# EAGLE board T04_Display (EAGLE 7.1.0)
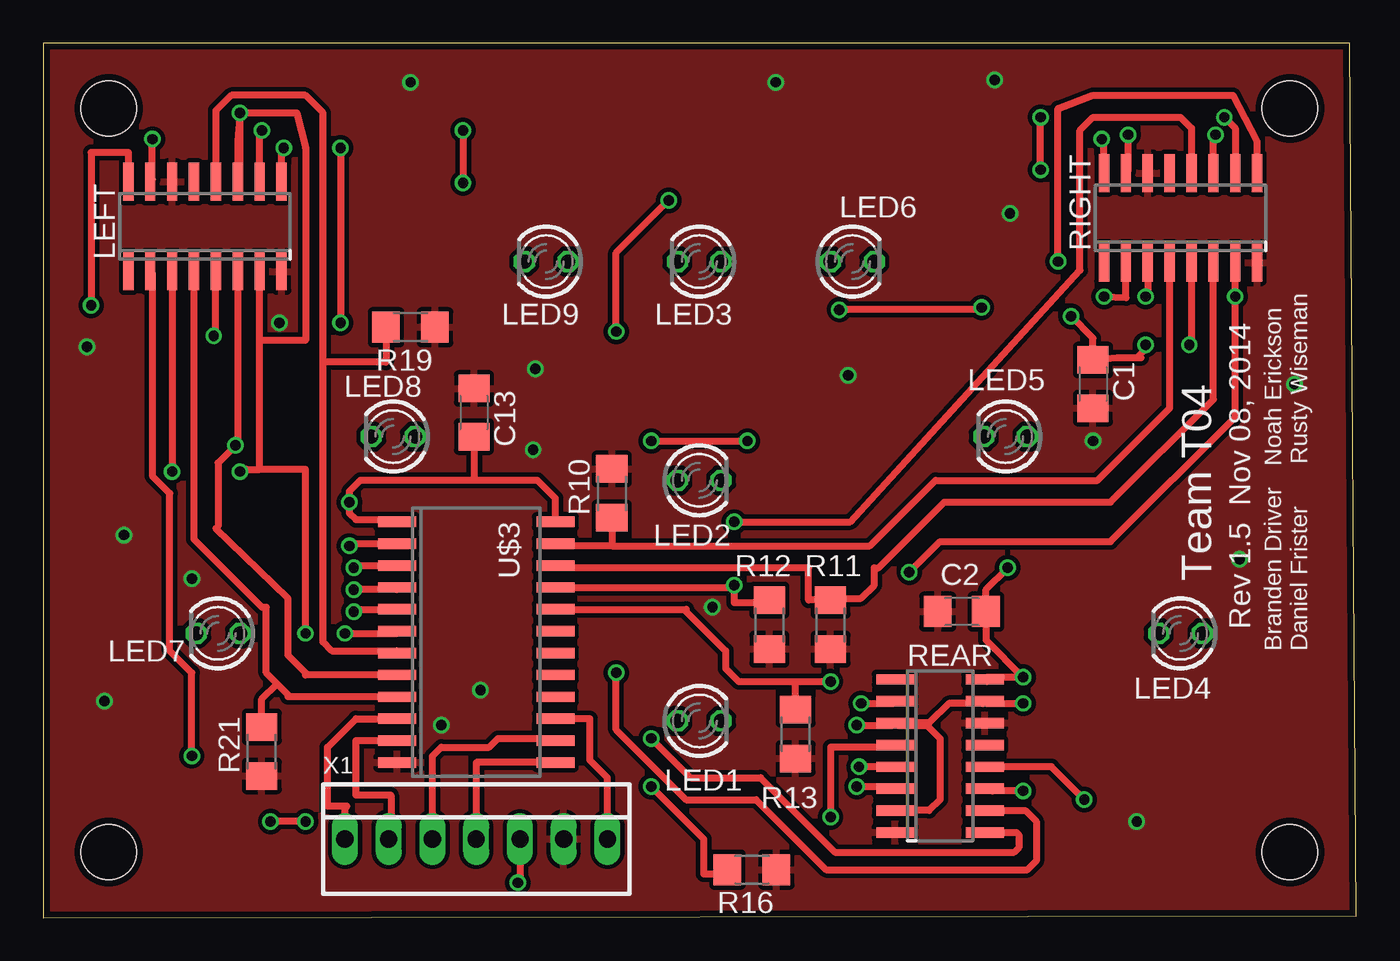
[diagram p0: board, top side]
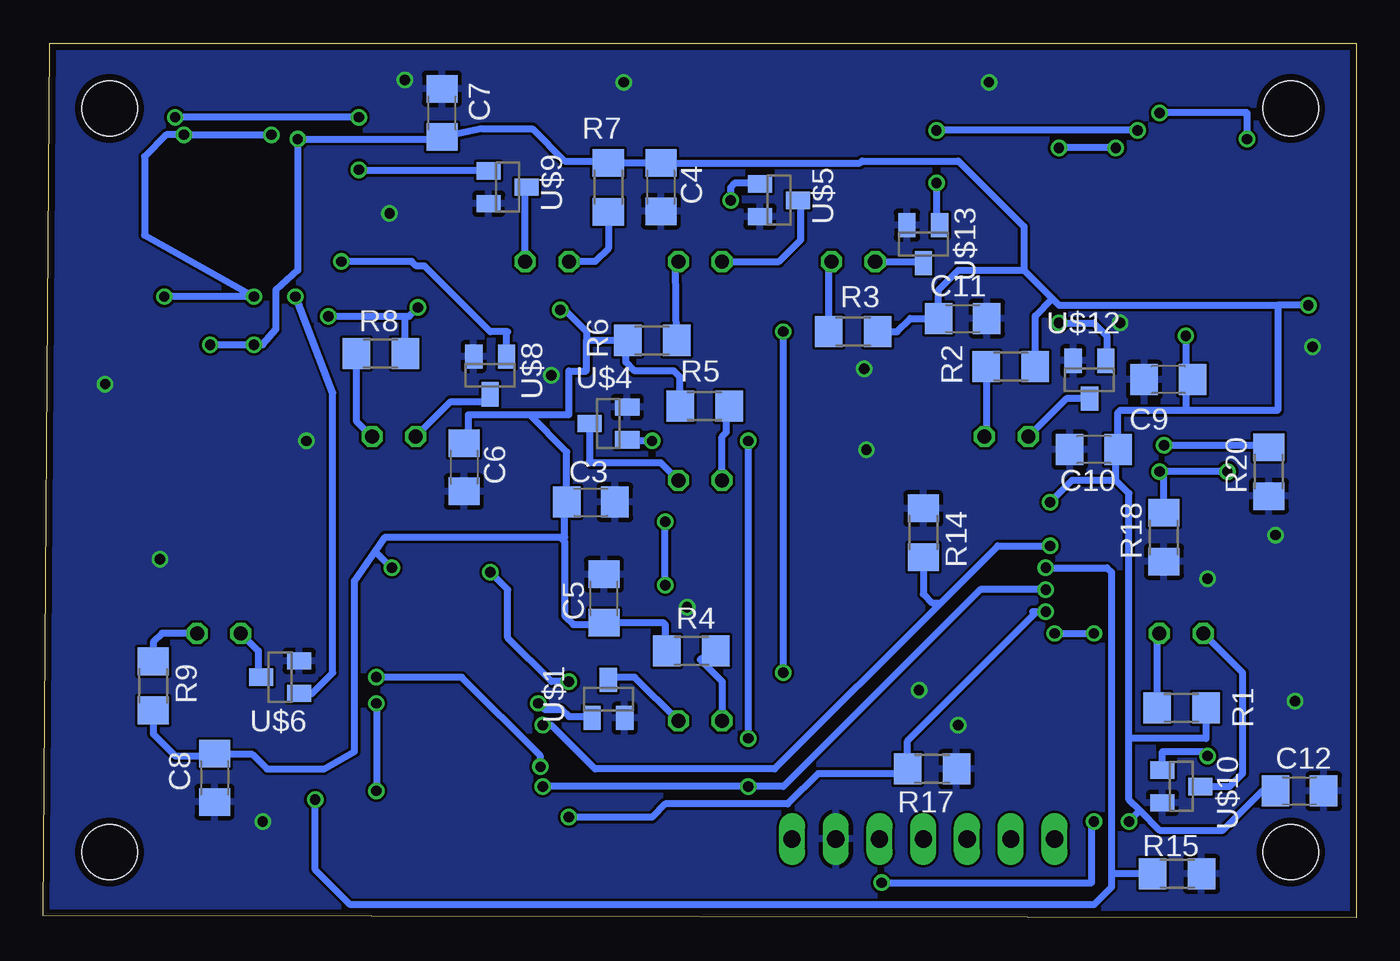
[diagram p1: board, bottom side, seen from below]

Size 76.25 x 50.79 mm. Coordinates in mm from the lower left corner, seen from the top.
Outline: 0,0 76.25,0.13 75.87,50.79 0,50.79 0,0
Copper layers (1*16): Top 0.0356mm / dielectric 1.5011mm / Bottom 0.0356mm
Design rules "OSH-Park-2-layer": minimum track width 6mil, minimum drill 13mil, track to track 6mil, track to pad 6mil, pad to pad 6mil, via to via 6mil, smd to smd 6mil, copper to edge 15mil, drill to drill 6mil, minimum pad ring 7mil, minimum via ring 7mil, stop-mask expansion 3mil, vias tented up to drill 0mil, thermal gap 10mil
Holes 3.2 mm at 72.39,3.81 3.81,3.81 3.81,46.99 72.39,46.99

## Footprints (pad centres in the part's own frame; a part is rotated, then mirrored left to right if it is on the bottom)
C1206 = smd 1.6 x 1.8: 1 -1.4,0; 2 1.4,0
LED3MM = drill 0.813 octagon: A -1.27,0; K 1.27,0
SOIC16N = smd 0.6 x 2.2: 1 -4.445,-2.6; 2 -3.175,-2.6; 3 -1.905,-2.6; 4 -0.635,-2.6; 5 0.635,-2.6; 6 1.905,-2.6; 7 3.175,-2.6; 8 4.445,-2.6; 9 4.445,2.6; 10 3.175,2.6; 11 1.905,2.6; 12 0.635,2.6; 13 -0.635,2.6; 14 -1.905,2.6; 15 -3.175,2.6; 16 -4.445,2.6
R1206 = smd 1.6 x 1.803: 1 -1.422,0; 2 1.422,0
SOT23 = smd 1 x 1.4: 1 -0.95,-1.1; 2 0.95,-1.1; 3 0,1.1
SO24W = smd 0.6 x 2.2: 1 -6.985,-4.6; 2 -5.715,-4.6; 3 -4.445,-4.6; 4 -3.175,-4.6; 5 -1.905,-4.6; 6 -0.635,-4.6; 7 0.635,-4.6; 8 1.905,-4.6; 9 3.175,-4.6; 10 4.445,-4.6; 11 5.715,-4.6; 12 6.985,-4.6; 13 6.985,4.6; 14 5.715,4.6; 15 4.445,4.6; 16 3.175,4.6; 17 1.905,4.6; 18 0.635,4.6; 19 -0.635,4.6; 20 -1.905,4.6; 21 -3.175,4.6; 22 -4.445,4.6; 23 -5.715,4.6; 24 -6.985,4.6
22-23-2071 = drill 1 long: 1 -7.62,0; 2 -5.08,0; 3 -2.54,0; 4 0,0; 5 2.54,0; 6 5.08,0; 7 7.62,0

## Placement (x,y rotation side)
C1  0.1u  [C1206]  60.96,30.99 270 top
C2  0.1u  [C1206]  53.34,17.78 180 top
C3  0.1u  [C1206]  44.45,24.13 0 bottom
C4  0.1u  [C1206]  40.39,42.42 270 bottom
C5  0.1u  [C1206]  43.69,18.54 90 bottom
C6  0.1u  [C1206]  51.82,26.16 270 bottom
C7  0.1u  [C1206]  53.09,46.74 90 bottom
C8  0.1u  [C1206]  66.29,8.13 270 bottom
C9  0.1u  [C1206]  10.92,31.24 180 bottom
C10  0.1u  [C1206]  15.24,27.18 180 bottom
C11  0.1u  [C1206]  22.86,34.8 0 bottom
C12  0.1u  [C1206]  3.3,7.37 0 bottom
C13  0.1u  [C1206]  25.02,29.34 270 top
LED1  G  [LED3MM]  38.1,11.43 0 top
LED2  Y  [LED3MM]  38.1,25.4 0 top
LED3  R  [LED3MM]  38.1,38.1 180 top
LED4  G  [LED3MM]  66.04,16.51 180 top
LED5  Y  [LED3MM]  55.88,27.94 180 top
LED6  R  [LED3MM]  46.99,38.1 0 top
LED7  G  [LED3MM]  10.16,16.51 180 top
LED8  Y  [LED3MM]  20.32,27.94 180 top
LED9  R  [LED3MM]  29.21,38.1 180 top
LEFT  CD4043  [SOIC16N]  9.4,40.13 0 top
R1  150  [R1206]  10.16,12.19 0 bottom
R2  150  [R1206]  20.07,32 0 bottom
R3  150  [R1206]  29.21,34.04 0 bottom
R4  150  [R1206]  38.61,15.49 180 bottom
R5  150  [R1206]  37.85,29.72 180 bottom
R6  150  [R1206]  40.89,33.53 180 bottom
R7  150  [R1206]  43.43,42.42 90 bottom
R8  150  [R1206]  56.64,32.77 0 bottom
R9  150  [R1206]  69.85,13.46 270 bottom
R10  4700  [R1206]  33.02,24.64 270 top
R11  4700  [R1206]  45.72,17.02 90 top
R12  4700  [R1206]  42.16,17.02 90 top
R13  4700  [R1206]  43.69,10.67 90 top
R14  4700  [R1206]  25.15,22.35 270 bottom
R15  4700  [R1206]  10.41,2.54 180 bottom
R16  4700  [R1206]  41.15,2.79 180 top
R17  4700  [R1206]  24.64,8.64 180 bottom
R18  4700  [R1206]  11.18,22.1 90 bottom
R19  4700  [R1206]  21.34,34.29 180 top
R20  4700  [R1206]  5.08,25.91 90 bottom
R21  4700  [R1206]  12.7,9.65 90 top
REAR  CD4043  [SOIC16N]  52.07,9.4 270 top
RIGHT  CD4043  [SOIC16N]  66.04,40.64 0 top
U$1  2N7002  [SOT23]  43.43,12.7 0 bottom
U$3  HEF4067B  [SO24W]  25.15,16 270 top
U$4  2N7002  [SOT23]  43.43,28.7 90 bottom
U$5  2N7002  [SOT23]  33.53,41.66 270 bottom
U$6  2N7002  [SOT23]  62.48,13.97 90 bottom
U$8  2N7002  [SOT23]  50.29,31.5 180 bottom
U$9  2N7002  [SOT23]  49.28,42.42 270 bottom
U$10  2N7002  [SOT23]  10.16,7.62 270 bottom
U$12  2N7002  [SOT23]  15.49,31.24 180 bottom
U$13  2N7002  [SOT23]  25.15,39.12 180 bottom
X1  22-23-2071  [22-23-2071]  25.15,4.57 0 top

## Library data of the parts
C1-C13 = resistor; SPICEPREFIX: C
LED1-LED9 LEFT REAR RIGHT U$1 U$3-U$6 U$8-U$10 U$12 U$13 = display
R1-R21 = rcl
X1 = con-molex; MF: MOLEX; MPN: 22-23-2071; OC_FARNELL: 1654534; OC_NEWARK: 56H0445

## Nets
A0: U$3.10 X1.1
A1: U$3.11 X1.2
A2: U$3.14 X1.3
A3: U$3.13 X1.4
BG: LEFT.2 U$10.1
BR: LEFT.10 U$13.1
BRES: LEFT.3 LEFT.7 LEFT.11 LEFT.15 R18.2 U$3.6
BS1: LEFT.4 R21.2 U$3.9
BS2: LEFT.6 R20.2 U$3.8
BS3: LEFT.12 R19.2 U$3.7
BY: LEFT.9 U$12.1
GND: C1.2 C2.2 C3.2 C4.2 C5.2 C6.2 C7.2 C8.2 C9.2 C10.2 C11.2 C12.2 C13.1 LEFT.8 LEFT.14 R10.1 R11.1 R12.1 R13.1 R14.1 R15.1 R16.1 R17.1 R18.1 R19.1 R20.1 R21.1 REAR.8 REAR.14 RIGHT.8 RIGHT.14 U$1.2 U$3.12 U$4.2 U$5.2 U$6.2 U$8.2 U$9.2 U$10.2 U$12.2 U$13.2 X1.6
LG: REAR.2 U$1.1
LR: REAR.10 U$5.1
LRES: R14.2 REAR.3 REAR.7 REAR.11 REAR.15 U$3.2
LS1: R17.2 REAR.4 U$3.5
LS2: R16.2 REAR.6 U$3.4
LS3: R15.2 REAR.12 U$3.3
LY: REAR.9 U$4.1
MUXENABLE: U$3.15 X1.7
N$1: LED3.K U$5.3
N$3: LED2.K U$4.3
N$4: LED1.K U$1.3
N$5: LED1.A R4.1
N$6: LED3.A R6.1
N$8: LED4.A R9.1
N$9: LED5.A R8.1
N$10: LED2.A R5.1
N$12: LED6.A R7.1
N$13: LED7.K U$10.3
N$14: LED7.A R1.1
N$15: LED8.K U$12.3
N$16: LED8.A R2.1
N$17: LED9.K U$13.3
N$18: LED9.A R3.1
N$21: LED6.K U$9.3
N$22: LED4.K U$6.3
N$23: LED5.K U$8.3
RG: RIGHT.2 U$6.1
RR: RIGHT.10 U$9.1
RRES: R13.2 RIGHT.3 RIGHT.7 RIGHT.11 RIGHT.15 U$3.20
RS1: R10.2 RIGHT.4 U$3.23
RS2: R11.2 RIGHT.6 U$3.22
RS3: R12.2 RIGHT.12 U$3.21
RY: RIGHT.9 U$8.1
VDD: C1.1 C2.1 C3.1 C4.1 C5.1 C6.1 C7.1 C8.1 C9.1 C10.1 C11.1 C12.1 C13.2 LEFT.5 LEFT.16 R1.2 R2.2 R3.2 R4.2 R5.2 R6.2 R7.2 R8.2 R9.2 REAR.5 REAR.16 RIGHT.5 RIGHT.16 U$3.1 U$3.24 X1.5

## Tracks (layer width: path | path; a pad name or v marks a point on that pad's centre or on a via)
A0
  Top 0.406: U$3.10 18.16,11.56 16.51,9.91 16.51,6.48 17.65,6.48 17.53,6.35 X1.1
A1
  Top 0.406: U$3.11 18.16,10.29 18.16,7.11 20.19,7.11 20.19,4.7 X1.2
A2
  Top 0.406: U$3.14 29.62,10.41 26.42,10.41 25.91,9.91 23.11,9.91 22.61,9.4 X1.3
A3
  Top 0.406: U$3.13 25.15,9.02 X1.4
BG  (via drill 0.6)
  Top 0.406: LEFT.2 6.35,37.41 6.35,25.65 7.37,24.64 7.37,15.49 8.64,14.22 v8.64,9.4
  Bottom 0.406: U$10.1 11.26,9.65 8.89,9.65 v8.64,9.4
BR  (via drill 0.6)
  Top 0.406: LEFT.10 12.57,45.59 v12.7,45.72 | v24.38,45.72 v24.38,42.67
  Bottom 0.406: v12.7,45.72 v24.38,45.72 | v24.38,42.67 24.38,40.4 U$13.1
BRES  (via drill 0.6)
  Top 0.406: v15.24,16.51 15.24,26.04 12.57,26.04 | 12.57,26.04 12.57,33.53 | 12.57,33.53 LEFT.7 | LEFT.15 6.35,42.86 v6.35,45.21 | v11.43,46.74 11.3,45.09 LEFT.11 11.43,42.86 v11.43,46.74 | v11.43,46.74 14.73,46.74 15.24,44.7 15.24,33.53 12.57,33.53 | LEFT.3 v7.49,25.91 | v11.43,25.91 11.81,26.04 12.57,26.04 | v17.53,16.51 20.55,16.51 U$3.6
  Bottom 0.406: v17.53,16.51 v15.24,16.51 | v6.35,45.21 6.35,46.74 v11.43,46.74 | v7.49,25.91 v11.43,25.91 11.18,25.91 R18.2
BS1
  Top 0.406: 13.59,13.59 14.22,12.95 14.22,12.83 U$3.9 | 13.59,13.59 12.95,14.22 12.95,18.03 12.7,18.03 8.76,21.97 LEFT.4 | R21.2 12.7,12.7 13.59,13.59
BS2  (via drill 0.6)
  Top 0.406: LEFT.6 11.3,27.56 arc-90 v11.18,27.43 10.16,26.42 10.16,22.73 10.03,22.61 14.22,18.54 14.22,15.24 15.24,14.22 15.24,14.1 U$3.8
  Bottom 0.406: 5.08,27.18 R20.2 arc-90 5.18,27.43 v11.18,27.43
BS3
  Top 0.406: 16.26,32.26 16.26,16 16.76,15.49 20.55,15.49 U$3.7 | 16.26,32.26 16.26,46.74 15.24,47.75 10.92,47.75 10.03,46.86 LEFT.12 | R19.2 19.91,32.26 16.26,32.26
BY  (via drill 0.6)
  Top 0.406: LEFT.9 13.84,44.58 v13.97,44.7 | v17.27,44.7 v17.27,34.54
  Bottom 0.406: v13.97,44.7 v17.27,44.7 | v17.27,34.54 15.24,34.54 14.48,33.78 14.48,32.41 U$12.1
GND  (via drill 0.6)
  other vias: 4.7,22.23 3.56,12.57 69.47,20.83 8.64,19.68 2.54,33.15 63.5,5.59 72.64,30.99 55.24,48.64 56.13,40.89 46.74,31.5 28.57,31.88 28.45,27.18 21.34,48.51 42.55,48.51 60.96,27.69 38.86,18.03 23.11,11.18 25.4,13.21 13.72,34.54
  pour Bottom: 0,0 0,50.8 75.95,50.8 76.33,0
  pour Top (isolate 0.254): 0,0 0,50.8 76.2,50.8 76.2,0
LG  (via drill 0.6)
  Top 0.406: v47.5,12.45 49.34,12.45 REAR.2
  Bottom 0.406: v47.5,12.45 47.16,12.11 46.14,12.11 45.72,11.68 44.47,11.68 U$1.1
LR  (via drill 0.6)
  Top 0.406: REAR.10 57.02,6.22 57.66,5.59 57.66,3.3 57.15,2.79 45.47,2.79 41.4,6.86 37.34,6.86 33.27,10.92 v33.27,14.22 | v33.27,34.04 33.27,38.61 v36.32,41.66
  Bottom 0.406: v33.27,14.22 v33.27,34.04 | v36.32,41.66 36.32,42.42 36.07,42.67 34.69,42.67 U$5.1
LRES  (via drill 0.6)
  Top 0.406: v56.9,12.45 54.8,12.45 REAR.15 54.54,12.45 52.58,12.45 51.44,11.3 REAR.3 | v56.9,7.37 55.12,7.37 54.99,7.49 REAR.11 | REAR.3 49.6,11.18 51.31,11.18 52.07,10.41 52.07,6.86 51.44,6.22 REAR.7 | v47.24,11.18 49.34,11.18 REAR.3 | U$3.2 17.78,21.72 v17.78,21.59
  Bottom 0.406: v56.9,12.45 v56.9,7.37 | 24.13,18.29 20.83,21.59 v17.78,21.59 | 24.13,18.29 33.78,8.64 44.2,8.64 46.74,11.18 v47.24,11.18 | R14.2 25.15,18.8 24.64,18.29 24.13,18.29
LS1  (via drill 0.6)
  Top 0.406: REAR.4 49.34,9.91 45.72,9.91 v45.72,5.84 | v18.03,17.78 18.16,17.91 U$3.5
  Bottom 0.406: 18.8,17.78 18.54,17.78 | 18.54,17.78 v18.03,17.78 | 18.54,17.78 26.06,10.26 R17.2 26.31,8.38 31.24,8.38 33.02,6.6 40.13,6.6 40.89,5.84 v45.72,5.84
LS2  (via drill 0.6)
  Top 0.406: 18.16,19.18 v18.03,19.05 20.55,19.05 U$3.4 | v47.24,7.62 49.34,7.62 REAR.6 | v35.31,7.62 38.35,4.57 38.35,2.54 39.47,2.54 R16.2
  Bottom 0.406: v18.03,19.05 21.84,19.05 33.27,7.62 v35.31,7.62 v47.24,7.62
LS3  (via drill 0.6)
  Top 0.406: v18.03,20.32 18.16,20.45 U$3.3 | v60.45,6.86 58.55,8.76 REAR.12
  Bottom 0.406: v18.03,20.32 14.48,20.32 14.22,20.07 14.22,2.54 | 14.22,2.54 14.22,1.78 15.24,0.76 58.42,0.76 60.45,2.79 v60.45,6.86 | R15.2 14.22,2.54
LY  (via drill 0.6)
  Top 0.406: REAR.9 56.52,4.95 56.64,4.83 56.64,4.06 56.39,3.81 45.97,3.81 41.66,8.13 37.59,8.13 v35.31,10.41 | v35.31,27.69 v40.89,27.69
  Bottom 0.406: v35.31,10.41 v35.31,27.69 | v40.89,27.69 42.33,27.69 U$4.1
MUXENABLE
  Top 0.406: X1.7 32.77,8.13 31.75,9.14 31.75,11.56 U$3.15
N$1
  Bottom 0.406: LED3.K 33.53,38.1 32.26,39.37 32.26,41.49 U$5.3
N$3
  Bottom 0.406: LED2.K 40.39,26.42 44.45,26.42 44.53,26.5 U$4.3
N$4
  Bottom 0.406: LED1.K 41.91,13.97 43.26,13.97 U$1.3
N$5
  Bottom 0.406: R4.1 38.1,14.99 36.83,13.72 LED1.A
N$6
  Bottom 0.406: R6.1 39.52,37.95 LED3.A
N$8
  Bottom 0.406: LED4.A 69.34,16.51 69.85,16 R9.1
N$9
  Bottom 0.406: R8.1 58.06,28.85 LED5.A
N$10
  Bottom 0.406: LED2.A 36.83,27.94 36.58,28.19 36.58,29.57 R5.1
N$12
  Bottom 0.406: R7.1 43.43,38.86 44.2,38.1 LED6.A
N$13
  Bottom 0.406: U$10.3 7.37,7.62 6.6,8.38 6.6,14.22 LED7.K
N$14
  Bottom 0.406: LED7.A 11.58,16.51 R1.1
N$15
  Bottom 0.406: U$12.3 16.85,30.14 LED8.K
N$16
  Bottom 0.406: R2.1 21.49,28.04 LED8.A
N$17
  Bottom 0.406: LED9.K 25.23,38.1 U$13.3
N$18
  Bottom 0.406: R3.1 30.63,37.95 LED9.A
N$21
  Bottom 0.406: LED6.K 48.26,42.33 U$9.3
N$22
  Bottom 0.406: LED4.K 63.75,15.49 63.75,14.14 U$6.3
N$23
  Bottom 0.406: LED5.K 52.58,29.97 50.72,29.97 U$8.3
RG  (via drill 0.6)
  Top 0.406: v61.59,36.07 62.87,36.01 RIGHT.2
  Bottom 0.406: v61.59,36.07 59.44,30.48 59.44,14.22 60.64,13.02 U$6.1
RR  (via drill 0.6)
  Top 0.406: v68.58,46.48 69.22,45.85 RIGHT.10 | v57.91,43.43 v57.91,46.48
  Bottom 0.406: v57.91,46.48 v68.58,46.48 | U$9.1 57.85,43.37 v57.91,43.43
RRES  (via drill 0.6)
  Top 0.406: RIGHT.7 v69.22,36.07 69.22,29.08 61.98,21.84 52.07,21.84 v50.29,20.07 | RIGHT.3 64.14,36.07 v64.01,36.07 | v62.99,45.47 62.99,43.37 RIGHT.15 | RIGHT.11 67.94,45.34 v68.07,45.47 | 43.69,13.72 40.39,13.72 39.62,14.48 39.62,15.49 37.34,17.78 37.34,17.91 U$3.20 | 43.69,13.72 v45.72,13.72 | R13.2 43.69,13.72
  Bottom 0.406: v69.22,36.07 v64.01,36.07 70.36,39.62 70.36,44.2 69.09,45.47 v68.07,45.47 v62.99,45.47 | v45.72,13.72 46.74,13.72 49.28,16.26 49.28,19.05 v50.29,20.07
RS1
  Top 0.406: 33.02,21.59 48.01,21.59 51.82,25.4 61.21,25.4 65.41,29.59 RIGHT.4 | R10.2 33.02,21.59 | 33.02,21.59 29.75,21.59 U$3.23
RS2
  Top 0.406: RIGHT.6 67.94,30.1 61.98,24.13 52.32,24.13 48.51,20.32 48.26,20.32 48.26,19.3 47.5,18.54 45.82,18.54 R11.2 44.45,18.44 44.45,20.32 29.75,20.32 U$3.22
RS3  (via drill 0.6)
  Top 0.406: v40.13,22.99 46.86,22.99 60.2,37.59 60.2,45.72 60.96,46.48 66.04,46.48 66.67,45.85 RIGHT.12 66.8,43.37 | R12.2 42.01,18.29 40.13,18.29 v40.13,19.3 40.13,19.18 U$3.21
  Bottom 0.406: v40.13,19.3 v40.13,22.99
RY  (via drill 0.6)
  Top 0.406: v58.93,38.1 58.93,46.99 60.96,47.75 69.09,47.75 70.48,45.09 RIGHT.9
  Bottom 0.406: v58.93,38.1 54.85,38.1 54.59,37.85 54.1,37.85 50.29,34.04 49.28,34.04 49.34,33.97 U$8.1
VDD  (via drill 0.6)
  Top 0.406: 54.8,13.72 REAR.16 54.8,13.97 v56.9,13.97 54.74,16.13 C2.1 54.74,19.05 v56.01,20.32 | RIGHT.5 66.67,33.4 v66.55,33.27 | 63.75,32.51 63.5,32.51 | 63.5,32.51 62.35,32.51 C1.1 60.96,33.66 v59.69,34.92 | RIGHT.16 61.59,45.09 v61.47,45.21 | v15.24,5.59 v13.21,5.59 | v9.91,33.78 10.03,33.91 10.03,36.83 10.16,36.83 10.16,37.53 LEFT.5 | v2.79,35.56 2.79,44.45 4.95,44.45 LEFT.16 | REAR.5 v47.37,8.76 | C13.2 25.02,25.53 25.15,25.4 | U$3.1 20.42,23.11 18.16,23.11 17.78,23.5 v17.78,24.13 17.78,24.77 18.41,25.4 25.15,25.4 | v64.01,33.27 64.01,33.02 63.5,32.51 | v54.48,35.43 54.36,35.31 v46.23,35.31 | U$3.24 29.75,24.36 28.7,25.4 25.15,25.4 | X1.5 27.69,2.16 v27.56,2.03
  Bottom 0.406: 19.3,37.59 19.3,40.13 23.11,43.94 28.7,43.94 28.83,43.82 C4.1 40.41,43.84 R7.2 43.54,43.94 45.97,43.94 47.84,45.8 50.75,45.8 C7.1 53.21,45.21 v61.47,45.21 61.47,37.59 62.74,36.45 62.74,34.16 63.5,33.27 v64.01,33.27 v66.55,33.27 | 19.3,37.59 17.65,35.94 | 17.65,35.94 17.27,35.56 4.57,35.56 | 4.57,35.56 4.57,29.46 9.91,29.46 | 9.91,29.46 13.72,29.46 13.84,29.34 C10.1 13.97,27.18 13.97,25.4 | v46.23,35.31 45.97,35.31 44.7,34.04 44.7,33.53 | 12.57,6.22 13.21,6.86 13.21,10.41 | 13.21,10.41 13.21,24.64 13.97,25.4 | 56.97,21.27 58.17,19.56 58.17,9.65 59.94,8.64 63.25,8.64 64.09,9.48 66.25,9.48 C8.1 66.42,9.4 68.58,9.4 69.85,10.67 R9.2 | 56.97,21.27 56.39,22.1 46.23,22.1 | 46.23,22.1 45.97,22.1 45.97,24.01 C3.1 45.85,27.05 48.01,29.21 | v13.21,5.59 12.57,6.22 | v9.91,33.78 9.91,32.13 | 9.91,32.13 C9.1 | v2.79,35.56 4.57,35.56 | 9.91,32.13 9.91,29.46 | v47.37,8.76 47.37,9.4 51.94,13.97 v56.9,13.97 | v56.01,20.32 v56.02,20.32 56.97,21.27 | 13.97,25.4 16.51,25.4 v17.78,24.13 | v59.69,34.92 55.12,34.92 | 55.12,34.92 54.99,34.92 v54.48,35.43 | v27.56,2.03 15.37,2.03 15.37,5.46 v15.24,5.59 | C6.1 51.56,27.82 51.56,29.21 48.01,29.21 | R1.2 8.74,10.41 13.21,10.41 | 12.57,6.22 11.43,5.08 7.74,5.08 5.46,7.37 C12.1 | R2.2 18.64,34.95 17.65,35.94 | R3.2 26.67,34.04 25.91,34.8 C11.1 24.26,36.45 23.11,37.59 19.3,37.59 | 44.7,33.53 R6.2 42.42,33.43 42.42,32.26 41.91,31.75 39.62,31.75 39.27,31.39 R5.2 | 46.23,22.1 45.97,21.84 45.97,17.53 45.47,17.02 43.81,17.02 C5.1 40.26,17.14 40.13,17.02 40.13,15.6 R4.2 | R8.2 55.22,34.82 55.12,34.92 | 48.01,29.21 45.72,29.21 45.72,31.75 44.7,31.75 44.7,33.53

## Text on the board
tSilk: Team T04 | Branden Driver Noah Erickson / Daniel Frister Rusty Wiseman
_tsilk: Rev 1.5 Nov 08, 2014